# EAGLE board led-sequencer (EAGLE 5.07)
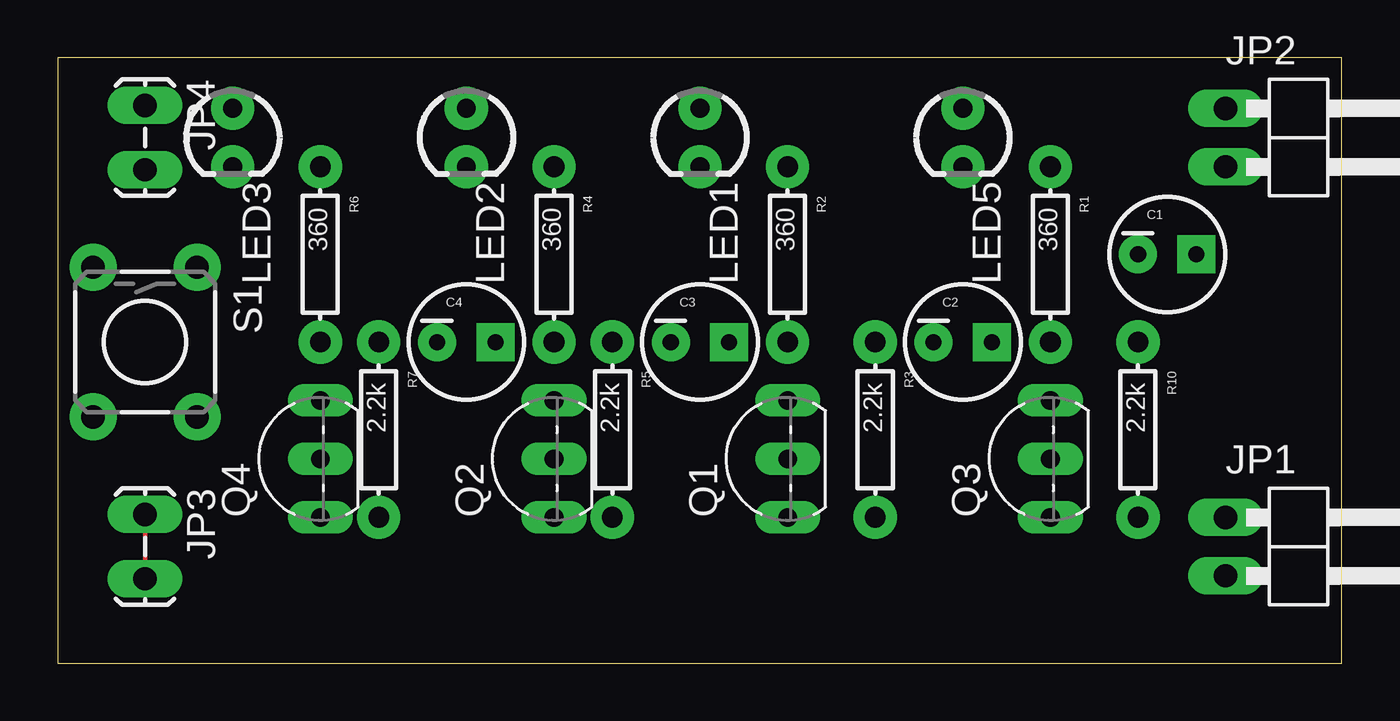
[diagram p0: board, top side]
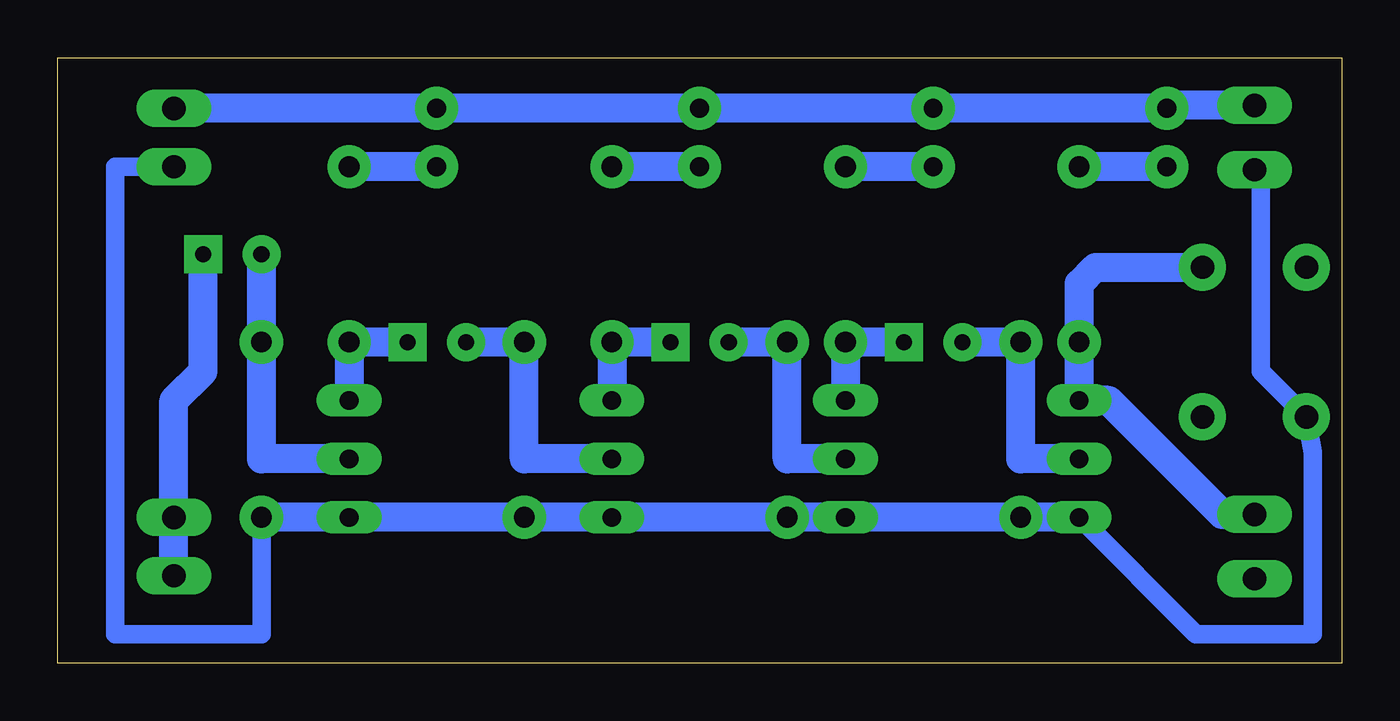
[diagram p1: board, bottom side, seen from below]

Size 55.86 x 26.34 mm. Coordinates in mm from the lower left corner, seen from the top.
Outline: 0,0 55.86,0 55.86,26.34 0,26.34 0,0
Copper layers (1*16): Top 0.035mm / dielectric 1.5mm / Bottom 0.035mm
Design rules "SparkFun": minimum track width 8mil, minimum drill 20mil, track to track 8mil, track to pad 8mil, pad to pad 8mil, via to via 8mil, smd to smd 8mil, copper to edge 10mil, drill to drill 8mil, minimum pad ring 12mil, minimum via ring 10mil, stop-mask expansion 4mil, vias tented up to drill 25mil, thermal gap 10mil

## Footprints (pad centres in the part's own frame; a part is rotated, then mirrored left to right if it is on the bottom)
CPOL-RADIAL-10UF-25V = drill 0.7 pad 1.651 square: 1 1.27,0 | drill 0.7 pad 1.651 round: 2 -1.27,0
1X02/90 = drill 1.016 long: 1 -1.27,-3.81; 2 1.27,-3.81
1X02_LOCK_LONGPADS = drill 1.016 long: 1 -0.127,0; 2 2.667,0
LED3MM = drill 0.813 pad 1.88 round: A -1.27,0; K 1.27,0
TO92-EBC = drill 0.813 long: B 0,-1.27; C 2.54,-1.27; E -2.54,-1.27
AXIAL-0.3 = drill 0.9 pad 1.88 round: P$1 -3.81,0; P$2 3.81,0
TACTILE-PTH = drill 1.016 pad 2.032 round: 1 -3.251,2.261; 2 3.251,2.261; 3 -3.251,-2.261; 4 3.251,-2.261

## Placement (x,y rotation side)
C1  47u  [CPOL-RADIAL-10UF-25V]  48.26,17.78 0 top
C2  47  [CPOL-RADIAL-10UF-25V]  39.37,13.97 0 top
C3  47u  [CPOL-RADIAL-10UF-25V]  27.94,13.97 0 top
C4  47u  [CPOL-RADIAL-10UF-25V]  17.78,13.97 0 top
JP1  trgger-in  [1X02/90]  54.61,5.08 270 top
JP2  power-out  [1X02/90]  54.61,22.86 270 top
JP3  trigger-out  [1X02_LOCK_LONGPADS]  3.81,6.35 270 top
JP4  power-in  [1X02_LOCK_LONGPADS]  3.81,24.13 270 top
LED1  red  [LED3MM]  27.94,22.86 270 top
LED2  red  [LED3MM]  17.78,22.86 270 top
LED3  red  [LED3MM]  7.62,22.86 270 top
LED5  red  [LED3MM]  39.37,22.86 270 top
Q1  9013  [TO92-EBC]  30.48,8.89 90 top
Q2  9013  [TO92-EBC]  20.32,8.89 90 top
Q3  9013  [TO92-EBC]  41.91,8.89 90 top
Q4  9013  [TO92-EBC]  10.16,8.89 90 top
R1  360  [AXIAL-0.3]  43.18,17.78 270 top
R2  360  [AXIAL-0.3]  31.75,17.78 270 top
R3  2.2k  [AXIAL-0.3]  35.56,10.16 270 top
R4  360  [AXIAL-0.3]  21.59,17.78 270 top
R5  2.2k  [AXIAL-0.3]  24.13,10.16 270 top
R6  360  [AXIAL-0.3]  11.43,17.78 270 top
R7  2.2k  [AXIAL-0.3]  13.97,10.16 270 top
R10  2.2k  [AXIAL-0.3]  46.99,10.16 270 top
S1  [TACTILE-PTH]  3.81,13.97 270 top

## Library data of the parts
C1-C4 JP3 JP4 = SparkFun
JP1 JP2 = pinhead
LED1-LED3 LED5 Q1-Q4 R1-R7 R10 S1 = digital-toy

## Nets
GND: JP2.2 JP4.2 Q1.E Q2.E Q3.E Q4.E R3.P$2 R5.P$2 R7.P$2 R10.P$2 S1.4
N$1: C3.1 Q1.C R2.P$2
N$2: LED1.K R2.P$1
N$3: C2.2 Q1.B R3.P$1
N$4: C1.1 JP1.1 JP1.2
N$5: C2.1 Q3.C R1.P$2
N$6: C4.1 Q2.C R4.P$2
N$7: LED2.K R4.P$1
N$8: C3.2 Q2.B R5.P$1
N$9: JP3.1 JP3.2 Q4.C R6.P$2 S1.1
N$10: LED3.K R6.P$1
N$11: C4.2 Q4.B R7.P$1
N$12: LED5.K R1.P$1
N$13: JP2.1 JP4.1 LED1.A LED2.A LED3.A LED5.A
N$16: C1.2 Q3.B R10.P$1

## Tracks (layer width: path | path; a pad name or v marks a point on that pad's centre or on a via)
GND
  Bottom 0.813: R10.P$2 46.99,1.27 53.34,1.27 53.34,21.59 JP2.2 | Q4.E 6.35,1.27 1.27,1.27 1.27,9.17 S1.4 3.53,12.7 3.53,21.18 JP4.2
  Bottom 1.27: Q4.E R7.P$2 Q2.E R5.P$2 Q1.E R3.P$2 Q3.E R10.P$2
N$1
  Bottom 1.27: Q1.C R2.P$2 C3.1
N$2
  Bottom 1.27: LED1.K R2.P$1
N$3
  Bottom 1.27: Q1.B 35.56,8.89 R3.P$1 C2.2
N$4
  Bottom 1.27: C1.1 49.53,12.7 50.8,11.43 JP1.1 JP1.2
N$5
  Bottom 1.27: C2.1 R1.P$2 Q3.C
N$6
  Bottom 1.27: Q2.C R4.P$2 C4.1
N$7
  Bottom 1.27: LED2.K R4.P$1
N$8
  Bottom 1.27: C3.2 R5.P$1 24.13,8.89 Q2.B
N$9
  Top 0.203: JP3.2 JP3.1
  Bottom 1.27: S1.1 10.72,17.22 11.43,16.51 R6.P$2 Q4.C 10.16,11.43 5.21,6.48 JP3.1
N$10
  Bottom 1.27: LED3.K R6.P$1
N$11
  Bottom 1.27: Q4.B 13.97,8.89 R7.P$1 C4.2
N$12
  Bottom 1.27: LED5.K R1.P$1
N$13
  Bottom 1.27: JP4.1 7.49,24.26 LED3.A LED2.A LED1.A LED5.A JP2.1
N$16
  Bottom 1.27: Q3.B 46.99,8.89 R10.P$1 C1.2